# Altium PCB PCB2.PcbDoc
Units mil, origin at the board's own origin, x right, y up, seen from the top; angles counter-clockwise.
Board outline 2755.91 x 2755.91 mil, 4 copper layers (Top Layer, L2 (GND), L3, Bottom Layer), stack 52.112 mil thick; 68 components, 65 nets, 216 pads, 0 vias.
Unrouted connection lines stored in the file: 35.
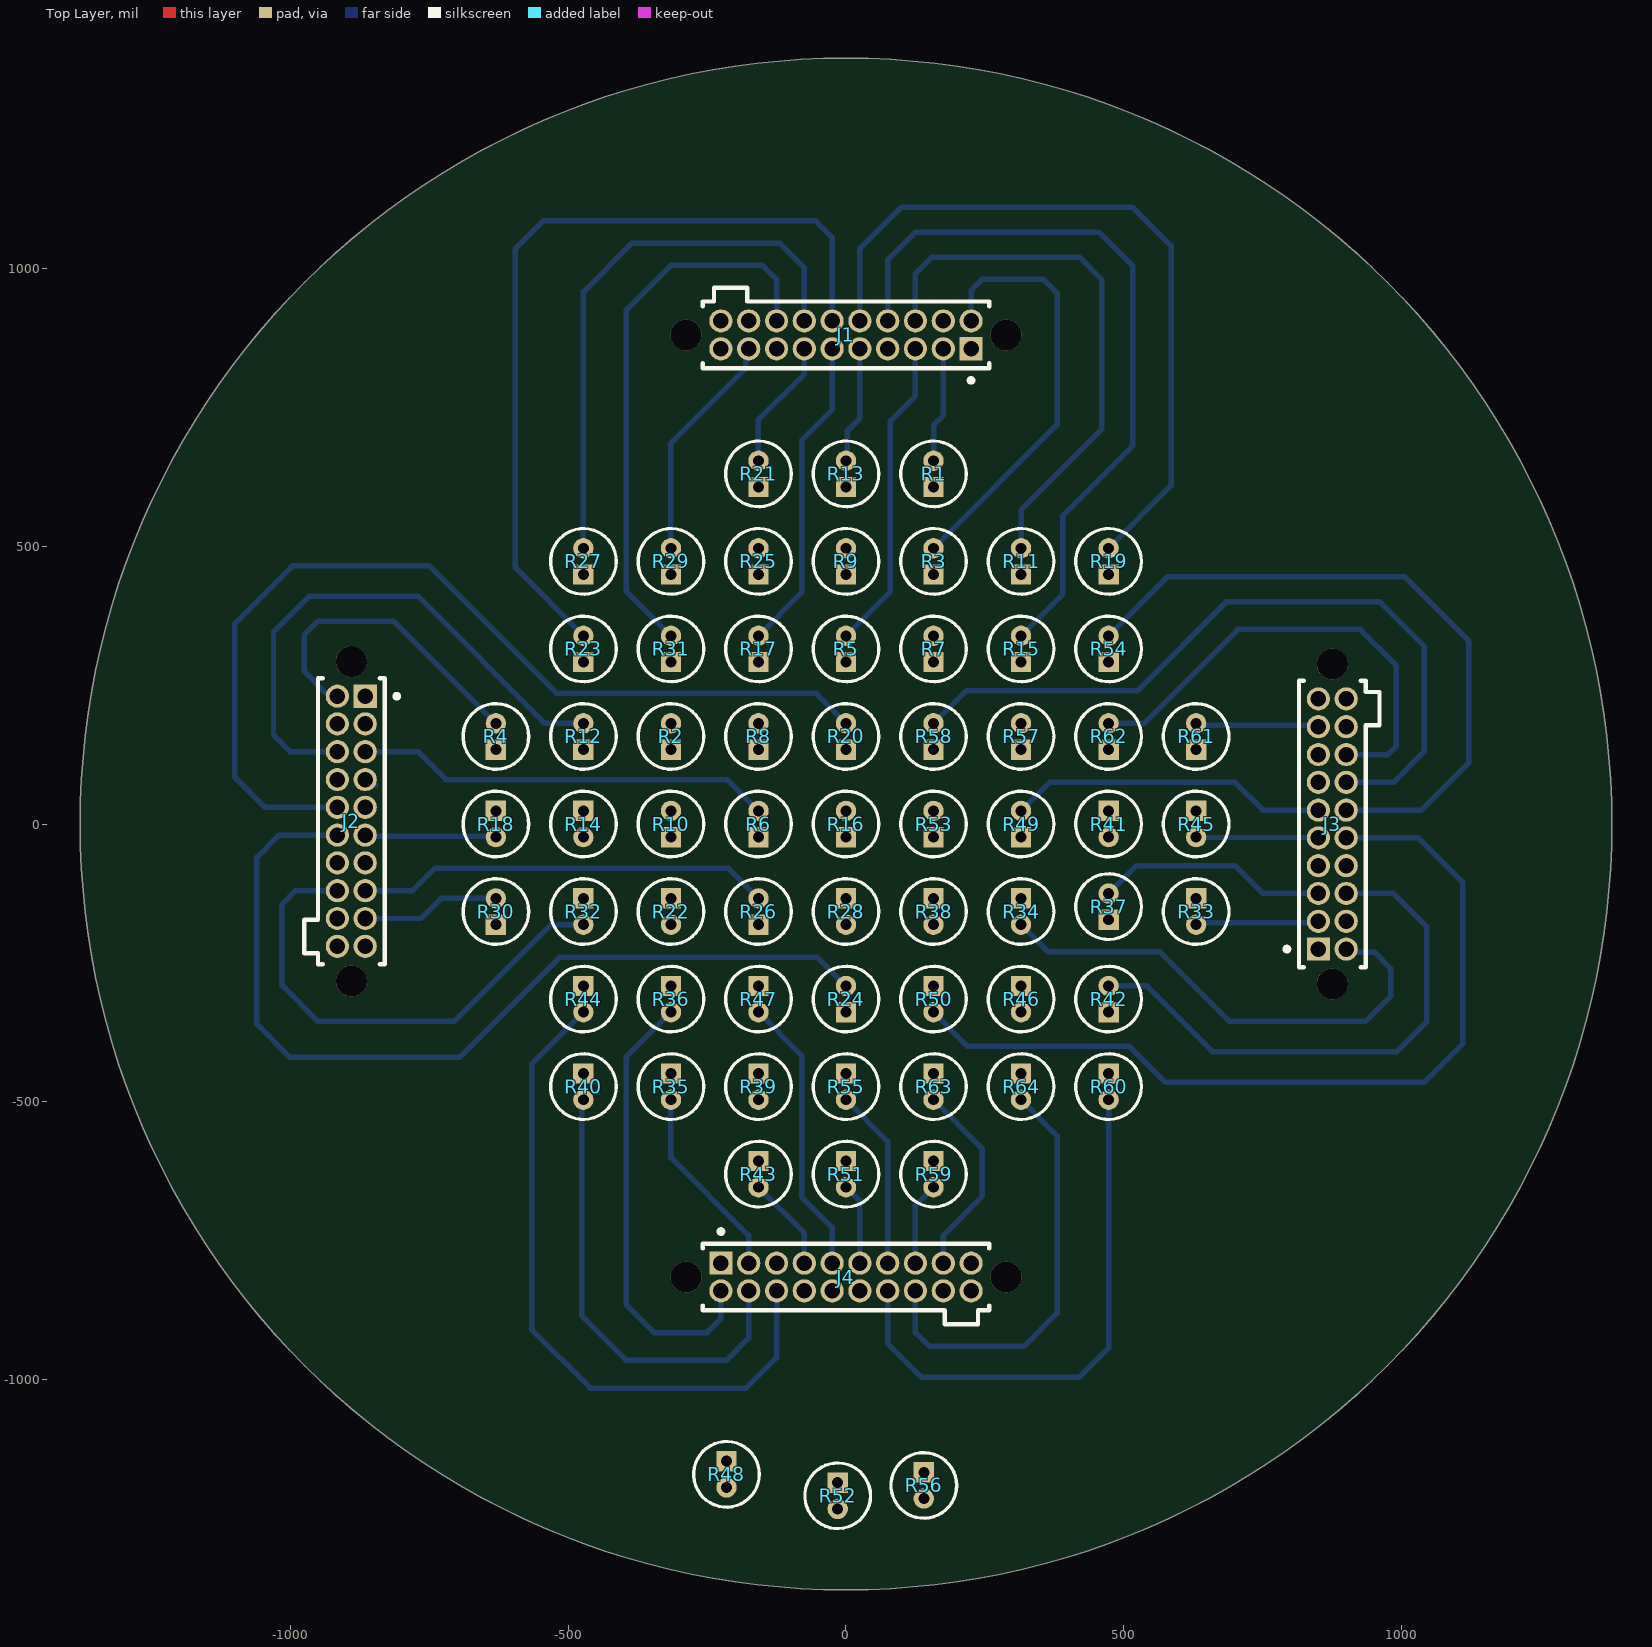
[diagram p0: Top Layer view]
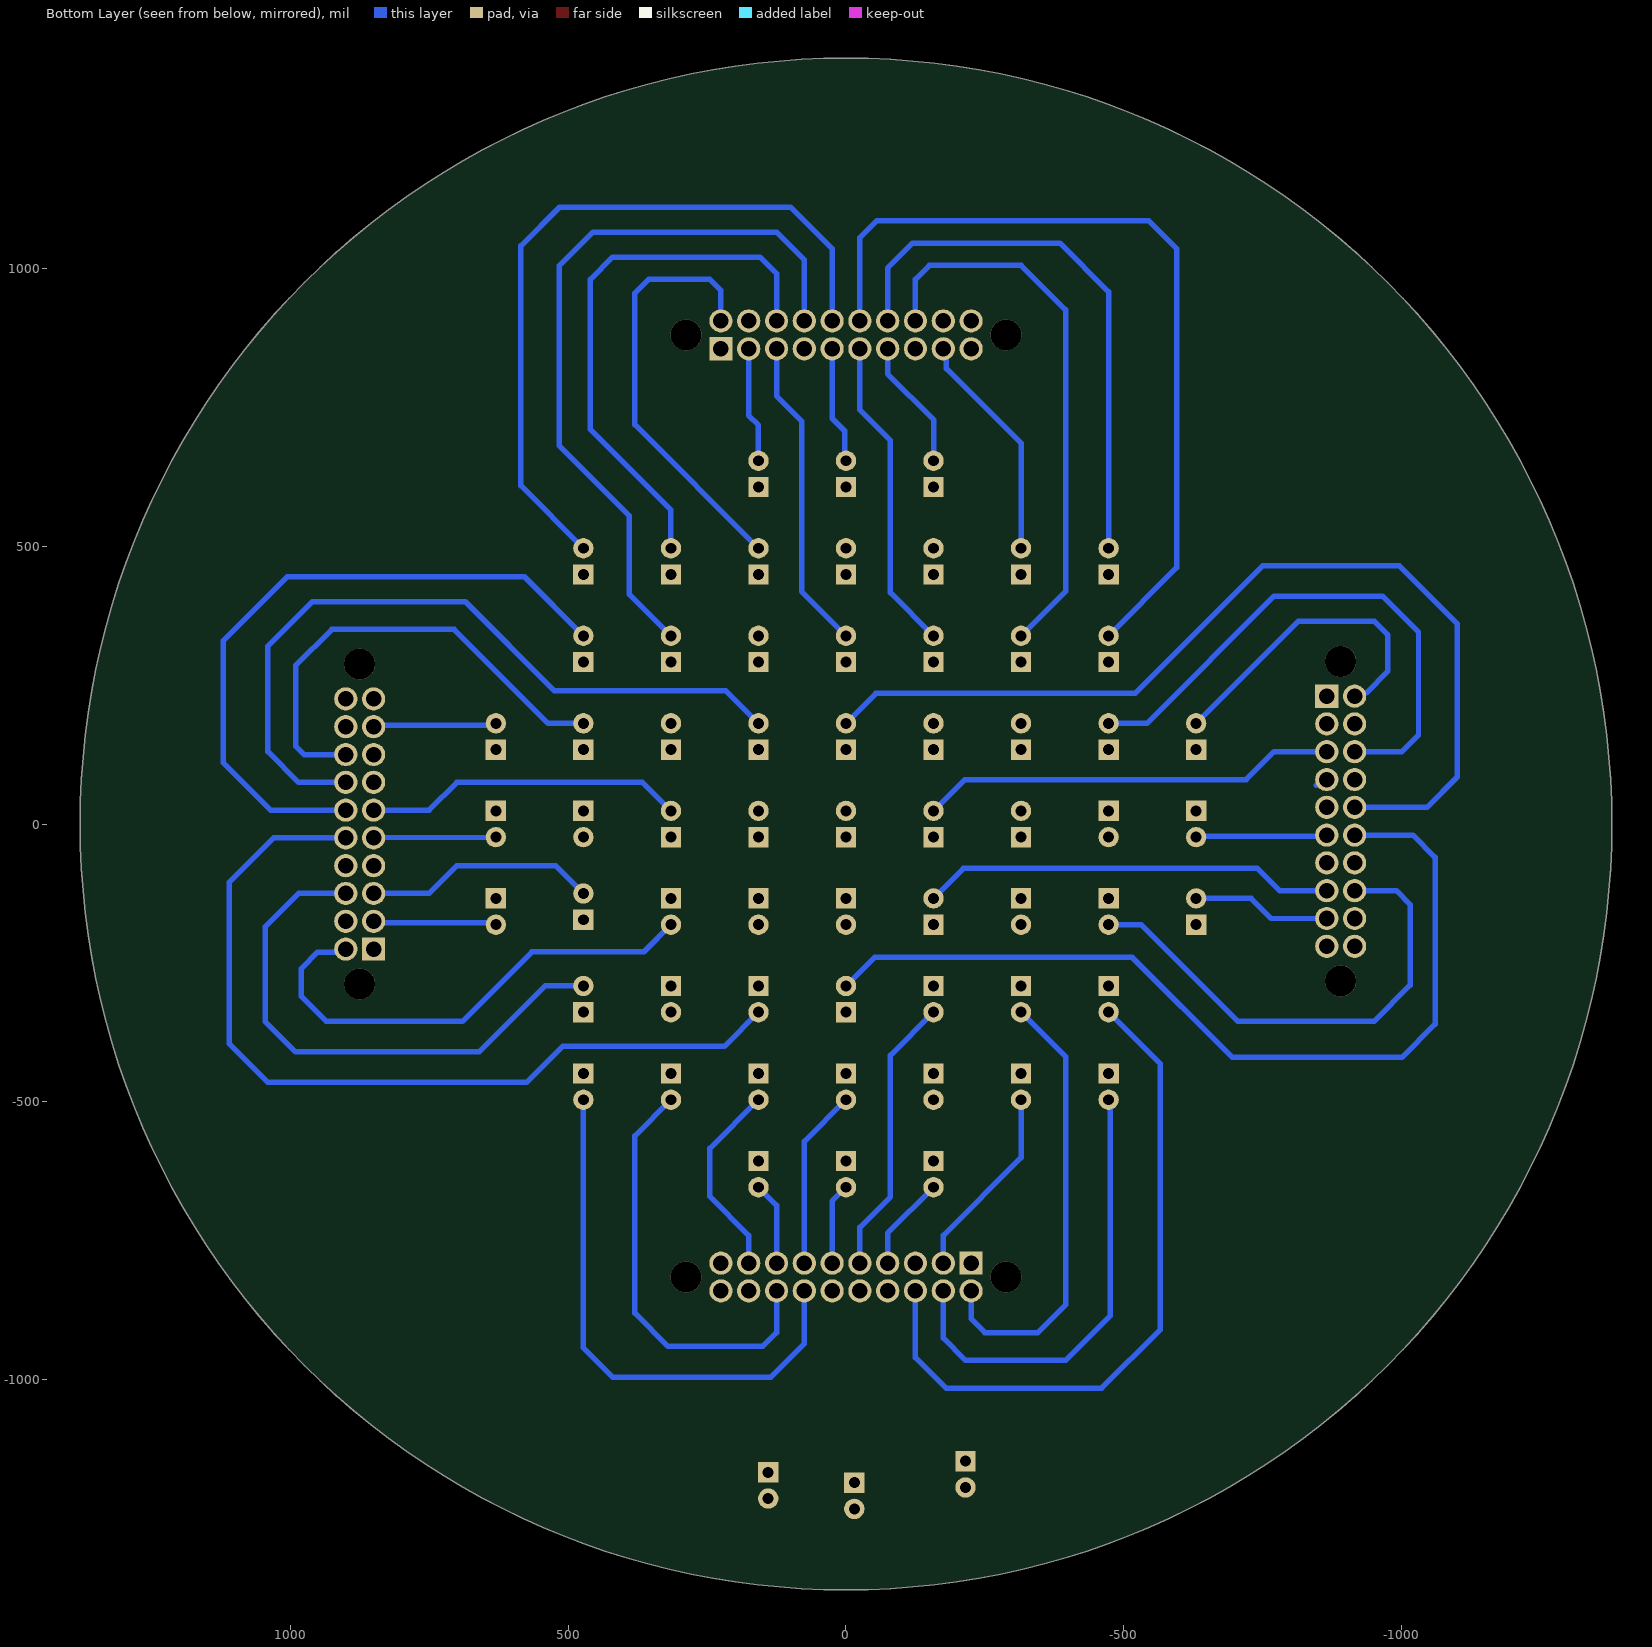
[diagram p1: Bottom Layer view, seen from below]
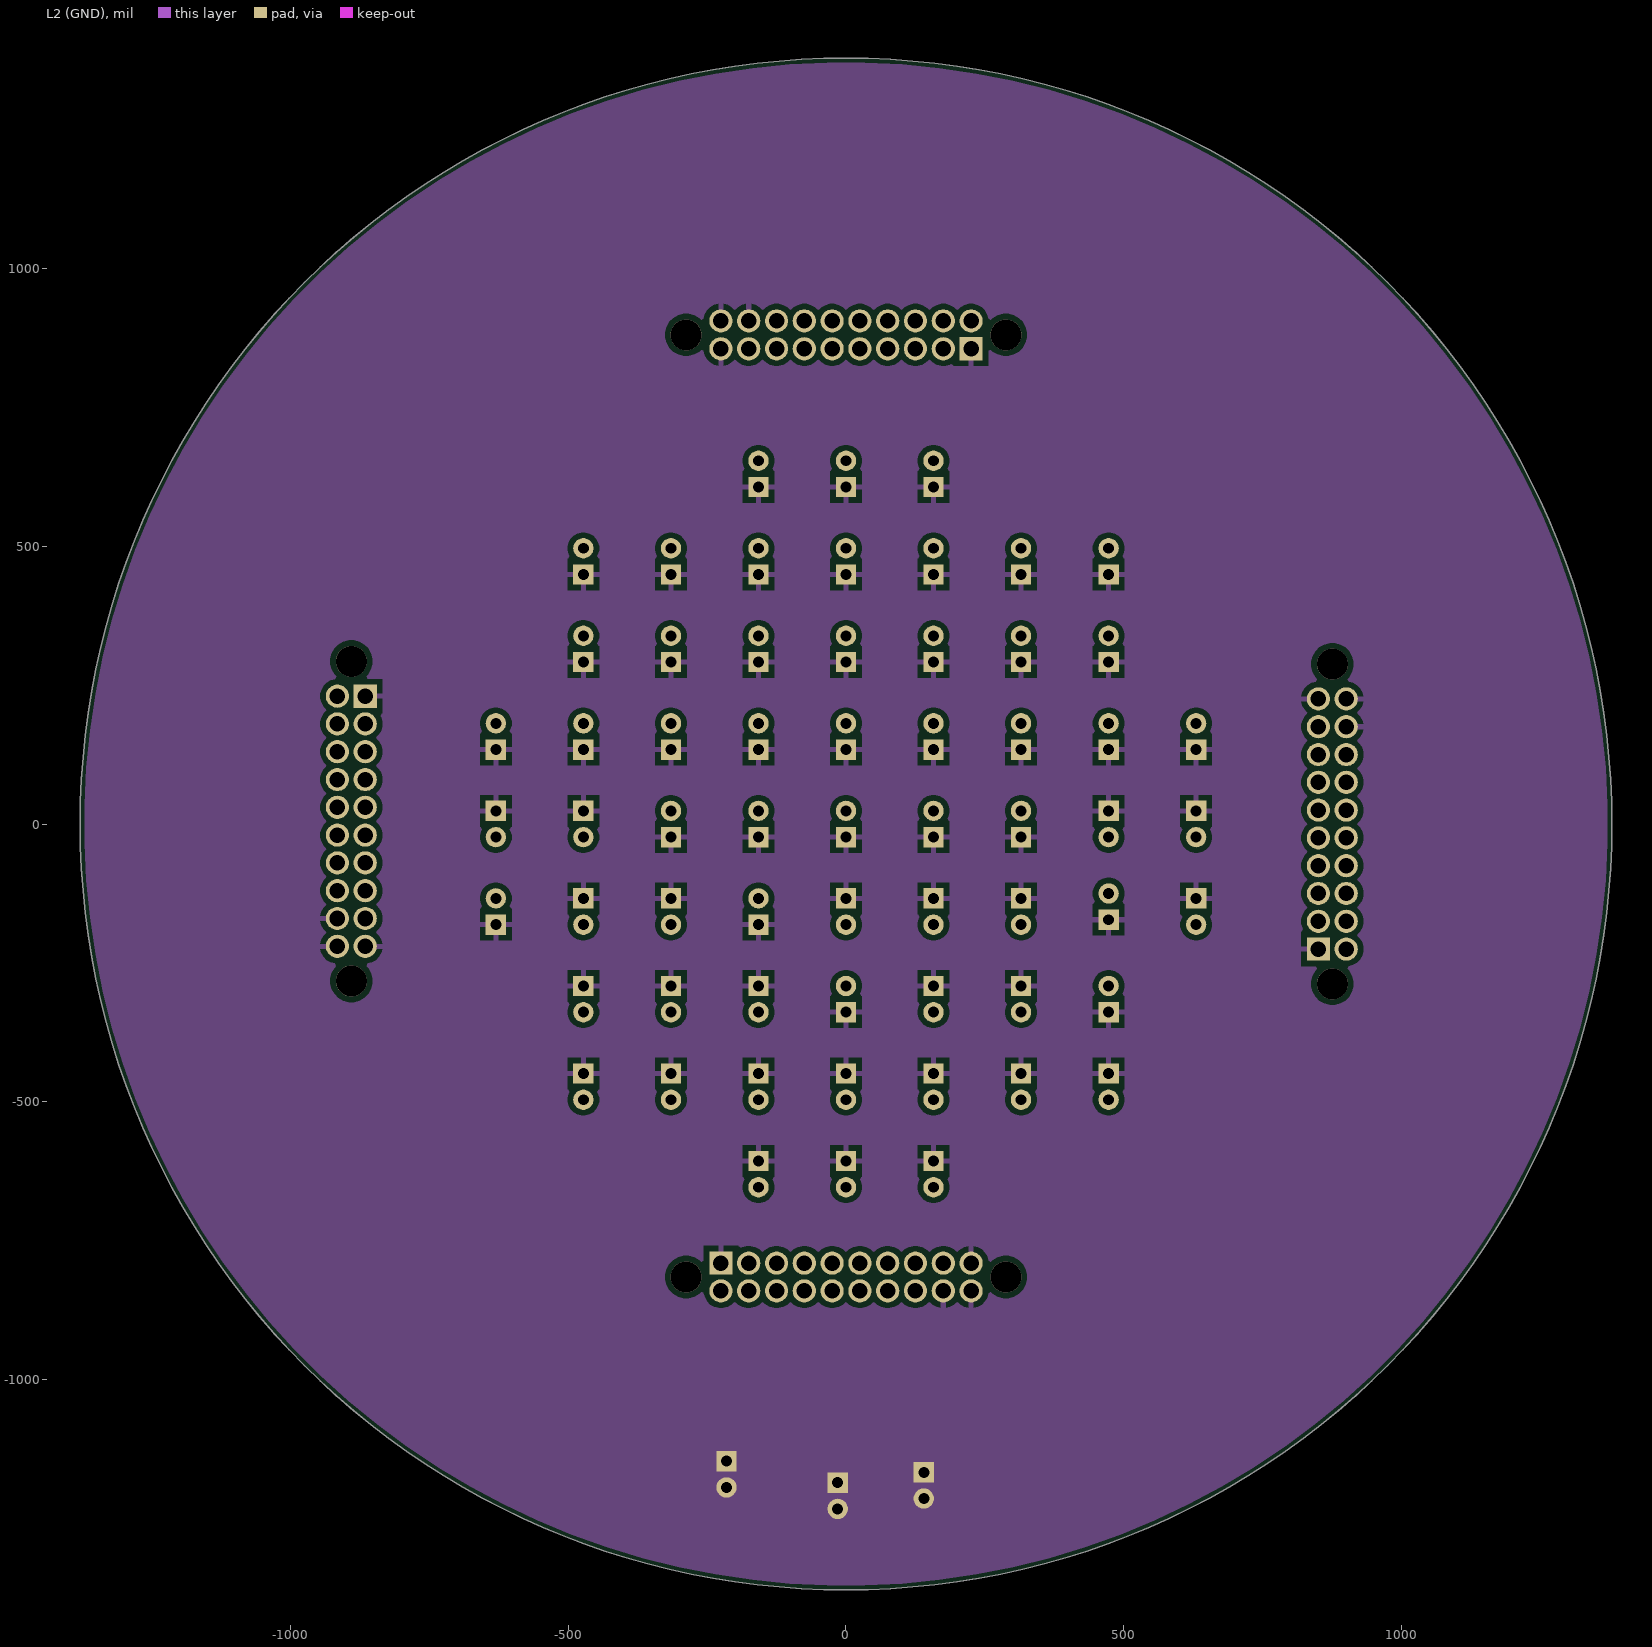
[diagram p2: L2 (GND)]
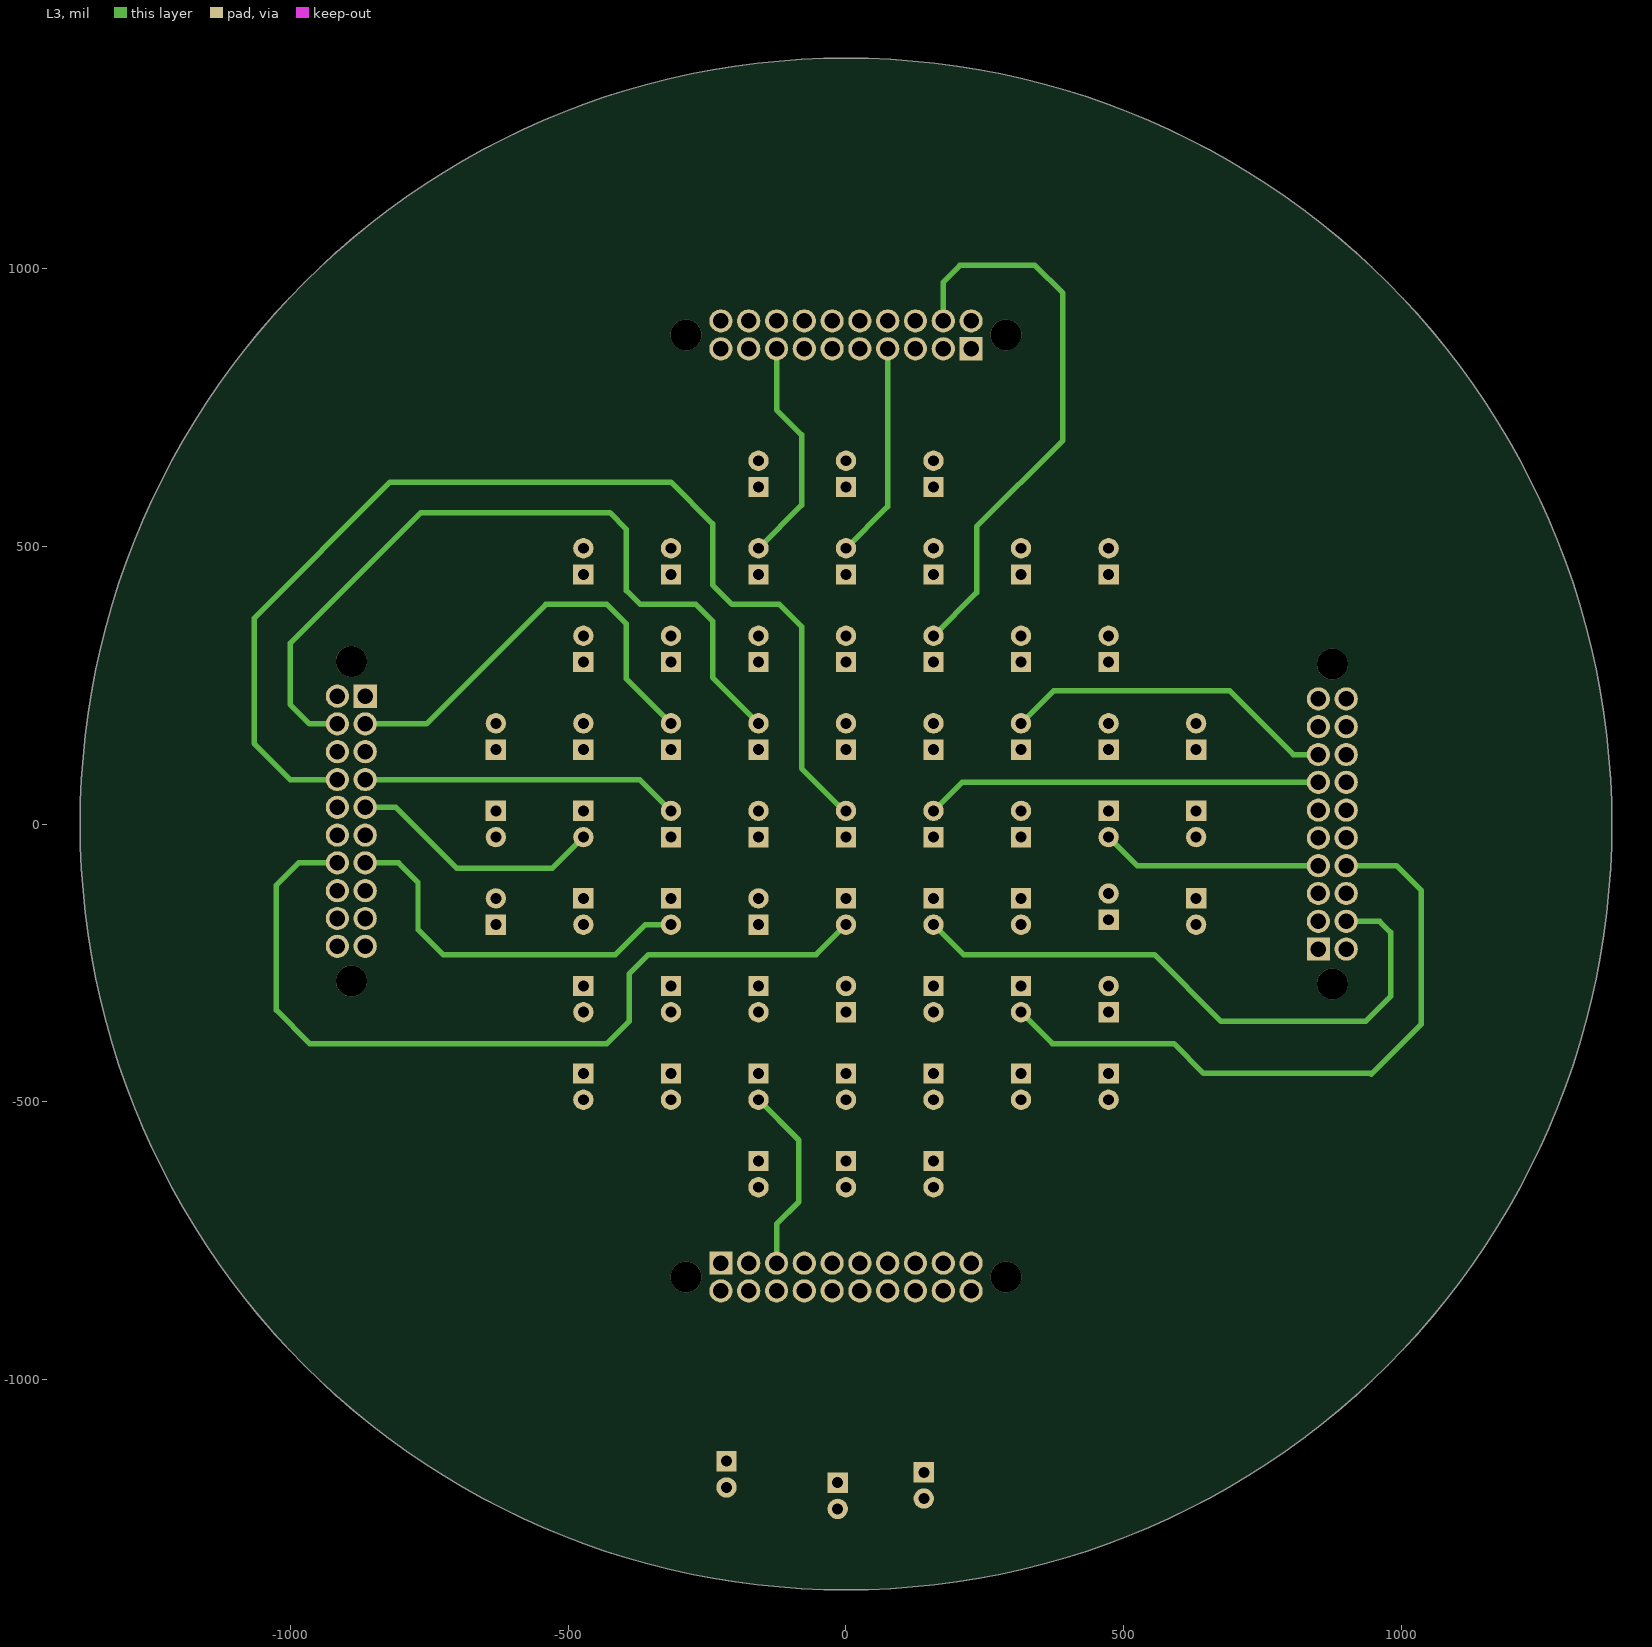
[diagram p3: L3]
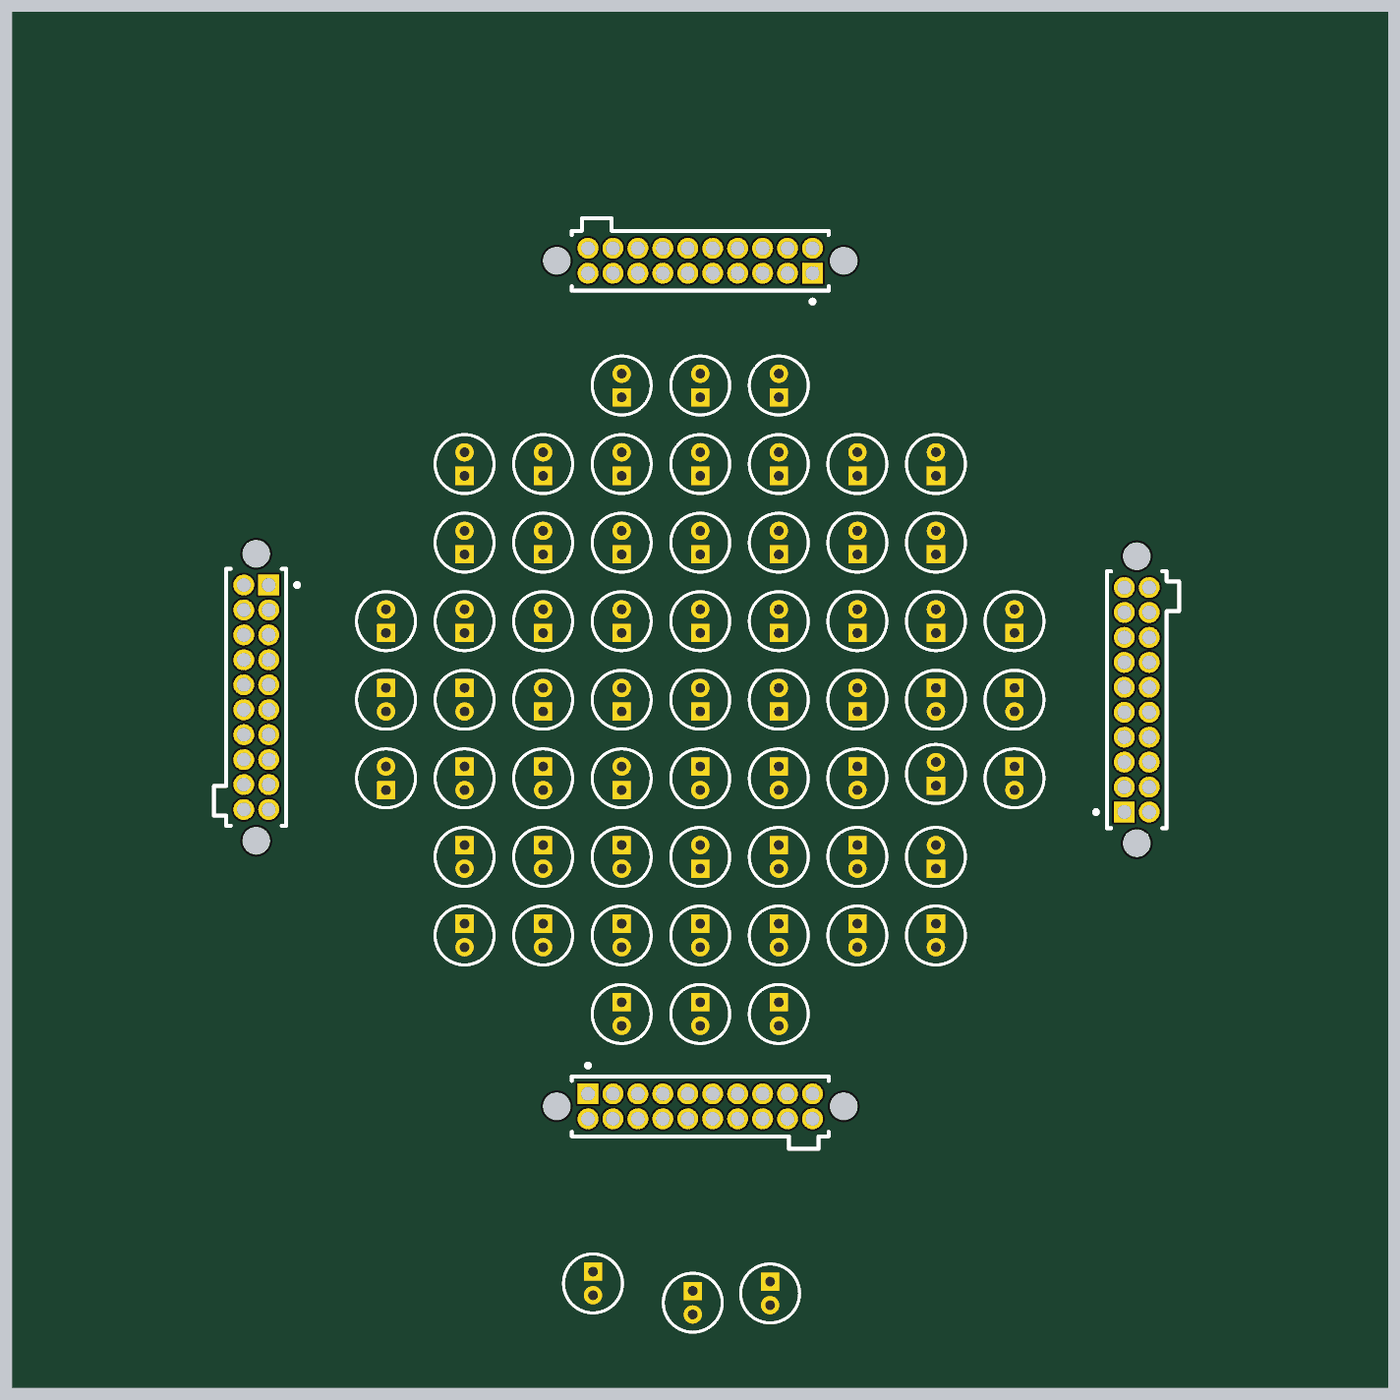
[diagram p4: 3D render of the assembled board from above, using the file's embedded part models]

## Layer stack, top to bottom
Top Solder: solder mask 1, SM-001, Dk 4
Top Layer: signal copper 1.378
Dielectric 2: prepreg 3.8, PP-012, Dk 4
L2 (GND): signal copper 1.378
Dielectric 1: core 39, Core-042, Dk 4.6
L3: signal copper 1.378
Dielectric 3: prepreg 3.8, PP-012, Dk 4
Bottom Layer: signal copper 1.378
Bottom Solder: solder mask 1, SM-001, Dk 4

## Board outline
0,-1377.95 cw(c0,0) -1377.95,0 cw(c0,0) 0,1377.95 cw(c0,0) 1377.95,0 cw(c0,0)

## Design rules (kind name [scope] priority, off if disabled: settings)
BoardOutlineClearance [All] p1: gap=7.87 ignorepadtopadclearanceinfootprint=FALSE
Clearance [All] p1: gap=9.84 ignorepadtopadclearanceinfootprint=FALSE
HoleSize [All] p1: absolutevalues=TRUE maxlimit=244.09 minlimit=7.87 maxpercent=80.000 minpercent=20.000
MinimumAnnularRing MinimumAnnularRing_1 [All] p1: minimumring=5.91
PolygonConnect [All] p1: connectstyle=Relief reliefconductorwidth=10 reliefentries=4 polygonreliefangle="90 Angle" airgapwidth=10
RoomDefinition Matrix [InComponentClass('Matrix')] p1: confinementstyle=ConfineIn formatcopy=TRUE lockcomponents=FALSE outline -1455,-1400 1445,-1400 1445,1425 -1455,1425
RoutingVias [All] p1: holewidth=11.81 width=27.56 viastyle="Through Hole" minholewidth=11.81 minwidth=27.56 maxholewidth=11.81 maxwidth=27.56
SolderMaskExpansion [All] p1: expansion=4 istentingtop=FALSE
UnRoutedNet [All] p1: checkbadconnections=TRUE
Width [All] p1: maxlimit=9.84 minlimit=9.84 preferedwidth=9.84
28 further rules are at their usual default settings.

## Components (designator, comment, footprint, x,y, rotation, side; value= is the part's Value field where it differs from the comment)
J1 "SFM-110-01-L-D-A" SAMTEC_SFM-110-01-L-D-A 0,880 r0 top value=5,13$
J2 "SFM-110-01-L-D-A" SAMTEC_SFM-110-01-L-D-A -890,5 r90 top value=5,13$
J3 "SFM-110-01-L-D-A" SAMTEC_SFM-110-01-L-D-A 875,0 r270 top value=5,13$
J4 "SFM-110-01-L-D-A" SAMTEC_SFM-110-01-L-D-A 0,-815 r180 top value=5,13$
R1 "NTCLE413E2103F524A" NTCLE413E2103F524A 157.48,629.92 r90 top
R2 "NTCLE413E2103F524A" NTCLE413E2103F524A -314.96,157.48 r90 top
R3 "NTCLE413E2103F524A" NTCLE413E2103F524A 157.48,472.44 r90 top
R4 "NTCLE413E2103F524A" NTCLE413E2103F524A -629.92,157.48 r90 top
R5 "NTCLE413E2103F524A" NTCLE413E2103F524A 0,314.96 r90 top
R6 "NTCLE413E2103F524A" NTCLE413E2103F524A -157.48,0 r90 top
R7 "NTCLE413E2103F524A" NTCLE413E2103F524A 157.48,314.96 r90 top
R8 "NTCLE413E2103F524A" NTCLE413E2103F524A -157.48,157.48 r90 top
R9 "NTCLE413E2103F524A" NTCLE413E2103F524A 0,472.44 r90 top
R10 "NTCLE413E2103F524A" NTCLE413E2103F524A -314.96,0 r90 top
R11 "NTCLE413E2103F524A" NTCLE413E2103F524A 314.96,472.44 r90 top
R12 "NTCLE413E2103F524A" NTCLE413E2103F524A -472.44,157.48 r90 top
R13 "NTCLE413E2103F524A" NTCLE413E2103F524A 0,629.92 r90 top
R14 "NTCLE413E2103F524A" NTCLE413E2103F524A -472.44,0 r270 top
R15 "NTCLE413E2103F524A" NTCLE413E2103F524A 314.96,314.96 r90 top
R16 "NTCLE413E2103F524A" NTCLE413E2103F524A 0,0 r90 top
R17 "NTCLE413E2103F524A" NTCLE413E2103F524A -157.48,314.96 r90 top
R18 "NTCLE413E2103F524A" NTCLE413E2103F524A -629.92,0 r270 top
R19 "NTCLE413E2103F524A" NTCLE413E2103F524A 472.44,472.44 r90 top
R20 "NTCLE413E2103F524A" NTCLE413E2103F524A 0,157.48 r90 top
R21 "NTCLE413E2103F524A" NTCLE413E2103F524A -157.48,629.92 r90 top
R22 "NTCLE413E2103F524A" NTCLE413E2103F524A -314.96,-157.48 r270 top
R23 "NTCLE413E2103F524A" NTCLE413E2103F524A -472.44,314.96 r90 top
R24 "NTCLE413E2103F524A" NTCLE413E2103F524A 0,-314.96 r90 top
R25 "NTCLE413E2103F524A" NTCLE413E2103F524A -157.48,472.44 r90 top
R26 "NTCLE413E2103F524A" NTCLE413E2103F524A -157.48,-157.48 r90 top
R27 "NTCLE413E2103F524A" NTCLE413E2103F524A -472.44,472.44 r90 top
R28 "NTCLE413E2103F524A" NTCLE413E2103F524A 0,-157.48 r270 top
R29 "NTCLE413E2103F524A" NTCLE413E2103F524A -314.96,472.44 r90 top
R30 "NTCLE413E2103F524A" NTCLE413E2103F524A -629.92,-157.48 r90 top
R31 "NTCLE413E2103F524A" NTCLE413E2103F524A -314.96,314.96 r90 top
R32 "NTCLE413E2103F524A" NTCLE413E2103F524A -472.44,-157.48 r270 top
R33 "NTCLE413E2103F524A" NTCLE413E2103F524A 629.92,-157.48 r270 top
R34 "NTCLE413E2103F524A" NTCLE413E2103F524A 314.96,-157.48 r270 top
R35 "NTCLE413E2103F524A" NTCLE413E2103F524A -314.96,-472.44 r270 top
R36 "NTCLE413E2103F524A" NTCLE413E2103F524A -314.96,-314.96 r270 top
R37 "NTCLE413E2103F524A" NTCLE413E2103F524A 472.44,-148.62 r90 top
R38 "NTCLE413E2103F524A" NTCLE413E2103F524A 157.48,-157.48 r270 top
R39 "NTCLE413E2103F524A" NTCLE413E2103F524A -157.48,-472.44 r270 top
R40 "NTCLE413E2103F524A" NTCLE413E2103F524A -472.44,-472.44 r270 top
R41 "NTCLE413E2103F524A" NTCLE413E2103F524A 472.44,0 r270 top
R42 "NTCLE413E2103F524A" NTCLE413E2103F524A 472.44,-314.96 r90 top
R43 "NTCLE413E2103F524A" NTCLE413E2103F524A -157.48,-629.92 r270 top
R44 "NTCLE413E2103F524A" NTCLE413E2103F524A -472.44,-314.96 r270 top
R45 "NTCLE413E2103F524A" NTCLE413E2103F524A 629.92,0 r270 top
R46 "NTCLE413E2103F524A" NTCLE413E2103F524A 314.96,-314.96 r270 top
R47 "NTCLE413E2103F524A" NTCLE413E2103F524A -157.48,-314.96 r270 top
R48 "NTCLE413E2103F524A" NTCLE413E2103F524A -215,-1170 r270 top
R49 "NTCLE413E2103F524A" NTCLE413E2103F524A 314.96,0 r90 top
R50 "NTCLE413E2103F524A" NTCLE413E2103F524A 157.48,-314.96 r270 top
R51 "NTCLE413E2103F524A" NTCLE413E2103F524A 0,-629.92 r270 top
R52 "NTCLE413E2103F524A" NTCLE413E2103F524A -15,-1208.62 r270 top
R53 "NTCLE413E2103F524A" NTCLE413E2103F524A 157.48,0 r90 top
R54 "NTCLE413E2103F524A" NTCLE413E2103F524A 472.44,314.96 r90 top
R55 "NTCLE413E2103F524A" NTCLE413E2103F524A 0,-472.44 r270 top
R56 "NTCLE413E2103F524A" NTCLE413E2103F524A 140,-1190 r270 top
R57 "NTCLE413E2103F524A" NTCLE413E2103F524A 314.96,157.48 r90 top
R58 "NTCLE413E2103F524A" NTCLE413E2103F524A 157.48,157.48 r90 top
R59 "NTCLE413E2103F524A" NTCLE413E2103F524A 157.48,-629.92 r270 top
R60 "NTCLE413E2103F524A" NTCLE413E2103F524A 472.44,-472.44 r270 top
R61 "NTCLE413E2103F524A" NTCLE413E2103F524A 629.92,157.48 r90 top
R62 "NTCLE413E2103F524A" NTCLE413E2103F524A 472.44,157.48 r90 top
R63 "NTCLE413E2103F524A" NTCLE413E2103F524A 157.48,-472.44 r270 top
R64 "NTCLE413E2103F524A" NTCLE413E2103F524A 314.96,-472.44 r270 top

## Footprints (in the part's own frame and the unit in brackets; to place one, negate y for a bottom-side part, rotate by r counter-clockwise, add the part's x,y. Pads: shape width x height; smd on the part's side, far side on the other; paste and mask are expansions set on the pad)
NTCLE413E2103F524A [mm]
  rect 0.93x0.93 hole 0.5 paste-1000 mask+0: 1(-0.6,0)
  round 0.93 hole 0.5 paste-1000 mask+0: 2(0.6,0)
  silkscreen extent -1.5,-1.5 1.5,1.5, body extent -1.48,-1.5 1.48,1.5, height 1
SAMTEC_SFM-110-01-L-D-A [mm]
  rect 1.06x1.06 hole 0.71: 01(5.715,-0.635)
  round 1.06 hole 0.71: 02(5.715,0.635) 03(4.445,-0.635) 04(4.445,0.635) 05(3.175,-0.635) 06(3.175,0.635) 07(1.905,-0.635) 08(1.905,0.635) 09(0.635,-0.635) 10(0.635,0.635) 11(-0.635,-0.635) 12(-0.635,0.635) 13(-1.905,-0.635) 14(-1.905,0.635) 15(-3.175,-0.635) 16(-3.175,0.635) 17(-4.445,-0.635) 18(-4.445,0.635) 19(-5.715,-0.635) 20(-5.715,0.635)
  round 1.42 hole 1.42 unplated: ""(-7.305,0) ""(7.305,0)
  silkscreen extent -6.54,-2.18 6.54,2.15

## Part data
J1 J2 J3 J4: library part CMP-022-000000-2, "Conn Socket Strip SKT 20 POS 1.27mm Solder ST SMD", Package=None, __ORIG_LIFECYCLESTATEGUID__=706004B5-C76E-482E-903B-BA0E4FAE086A, Availability=Unavailable, Component Type=Connectors, Contact Material=Copper, Contact Plating=Gold, Design Item ID=SFM-110-01-L-D-A, Gender=Receptacle, MF="Samtec Inc.", Mounting Technology="Through Hole", MP=SFM-110-01-L-D-A, Number of Contacts=20, Number of Rows=2, Packaging=Rail/Tube, Pin Count=20, Pitch=1.27mm, Price=None, Reach SVHC Compliant=Yes, RoHS Compliant=Yes, Source=SFM-110-01-L-D-A.SchLib, Termination=Solder
R1 R2 R3 R4 R5 R6 R7 R8 R9 R10 R11 R12 R13 R14 R15 R16 R17 R18 R19 R20 R21 R22 R23 R24 R25 R26 R27 R28 R29 R30 R31 R32 R33 R34 R35 R36 R37 R38 R39 R40 R41 R42 R43 R44 R45 R46 R47 R48 R49 R50 R51 R52 R53 R54 R55 R56 R57 R58 R59 R60 R61 R62 R63 R64: library part CMP-009-00185-19, "NTC epoxy PVC AWG30 105°C 10K 1% 3435K 1% L52 A", RoHS Compliant=Yes

## Nets (pads, with @x,y where several pads share a name; then routed paths per layer and width w, separated by ;. In a path a pad name is that pad's centre, name@x,y a point inside that pad or via, vN(x,y) a via of type N, cw(c..) or ccw(c..) an arc to the next point about the centre after c; other vN are vias at no path point)
A1: J1.03 R1.2 | length 208.7
  Bottom Layer w9.84: R1.2 157.48,717.48 175,735 J1.03
A2: J1.05 R5.2 | length 568.2
  Bottom Layer w9.84: R5.2 80,418.58 80,725 125,770 J1.05
A3: J1.07 R9.2 | length 390
  L3 w9.84: R9.2 75,571.06 J1.07
A4: J1.09 R13.2 | length 211.8
  Bottom Layer w9.84: R13.2 2.5,656.04 2.5,707.5 25,730 J1.09
A5: J1.11 R17.2 | length 571.3
  Bottom Layer w9.84: R17.2 -80,416.06 -80,690 -25,745 J1.11
A6: J1.13 R21.2 | length 235.6
  Bottom Layer w9.84: R21.2 -157.48,727.52 -75,810 J1.13
A7: J1.15 R25.2 | length 410.6
  L3 w9.84: R25.2 -80,573.54 -80,700 -125,745 J1.15
  Bottom Layer w9.84: J1.15@-125.63,854.37 J1.15
A8: J1.17 R29.2 | length 416.9
  Bottom Layer w9.84: R29.2 -314.96,685.04 -180.63,819.37 -180.63,849.37 J1.17
A10: J1.02 R3.2 | length 779.7
  Bottom Layer w9.84: R3.2 380,718.58 380,955 355,980 245,980 225,960 J1.02
A11: J1.04 R7.2 | length 1030.9
  L3 w9.84: R7.2 235,416.1 235,535 390,690 390,955 340,1005 205,1005 175,975 J1.04
A12: J1.06 R11.2 | length 993
  Bottom Layer w9.84: J1.06 125,990 155,1020 420,1020 460,980 460,710 315,565 R11.2 R11.2
A13: J1.08 R15.2 | length 1345.7
  Bottom Layer w9.84: J1.08 75,1015 125,1065 455,1065 516.05,1003.95 516.05,681.05 390,555 390,413.62 R15.2
A14: J1.10 R19.2 | length 1340.6
  Bottom Layer w9.84: J1.10 25,1035 100,1110 515,1110 585,1040 585,608.62 R19.2
A15: J1.12 R23.2 | length 1500.3
  Bottom Layer w9.84: R23.2 -595,461.14 -595,1035 -545,1085 -55,1085 -25,1055 J1.12
A16: J1.14 R27.2 | length 1008.8
  Bottom Layer w9.84: R27.2 -472.44,957.56 -385,1045 -120,1045 -75,1000 J1.14
A17: J1.16 R31.2 | length 1008.1
  Bottom Layer w9.84: R31.2 -395,418.62 -395,925 -315,1005 -150,1005 -125,980 J1.16
B1: J2.03 R2.2 | length 785.6
  L3 w9.84: J2.03 -755,180 -540,395 -430,395 -395,360 -395,261.14 R2.2
B2: J2.05 R6.2 | length 751.6
  Bottom Layer w9.84: J2.05 -770,130 -720,80 -213.86,80 R6.2
B3: J2.07 R10.2 | length 596.2
  L3 w9.84: J2.07 -371.34,80 R10.2
  Bottom Layer w9.84: J2.07 -856.37,80 -846.37,70
B4: J2.09 R14.2 | length 461.5
  L3 w9.84: J2.09 -810,30 -700,-80 -528.82,-80 R14.2
B5: J2.11 R18.2 | length 236.6
  Bottom Layer w9.84: J2.11 -863.19,-21.81 -631.73,-21.81 R18.2
B6: J2.13 R22.2 | length 690.5
  L3 w9.84: J2.13 -805,-70 -770,-105 -770,-190 -725,-235 -415,-235 -361.1,-181.1 R22.2
B7: J2.15 R26.2 | length 746.4
  Bottom Layer w9.84: J2.15 -780,-120 -740,-80 -211.34,-80 R26.2
B8: J2.17 R30.2 | length 250
  Bottom Layer w9.84: J2.17 -764.84,-170 -728.7,-133.86 R30.2
B10: J2.02 R4.2 | length 574.6
  Bottom Layer w9.84: J2.02 -921.1,236.1 -936.1,236.1 -975,275 -975,340 -950,365 -813.82,365 R4.2@-630.37,181.55
B11: J2.04 R8.2 | length 1430.1
  L3 w9.84: J2.04 -965,180 -1000,215 -1000,325 -765,560 -425,560 -395,530 -395,420 -370,395 -270,395 -240,365 -240,263.62 R8.2
B12: J2.06 R12.2 | length 991.7
  Bottom Layer w9.84: J2.06 -1000,130 -1030,160 -1030,345 -965,410 -770,410 -541.1,181.1 R12.2
B13: J2.08 R16.2 | length 2027.2
  L3 w9.84: J2.08 -1000,80 -1065,145 -1065,370 -820,615 -315,615 -240,540 -240,430 -205,395 -120,395 -80,355 -80,100 -3.62,23.62 R16.2
B14: J2.10 R20.2 | length 1743.9
  Bottom Layer w9.84: J2.10 -1045,30 -1100,85 -1100,360 -995,465 -750,465 -520,235 -53.9,235 R20.2
B15: J2.12 R24.2 | length 1642.2
  Bottom Layer w9.84: J2.12 -1020,-20 -1060,-60 -1060,-360 -1000,-420 -695,-420 -515,-240 -51.34,-240 R24.2
B16: J2.14 R28.2 | length 1539.8
  L3 w9.84: J2.14 -985,-70 -1025,-110 -1025,-335 -965,-395 -430,-395 -390,-355 -390,-270 -355,-235 -53.9,-235 R28.2
B17: J2.16 R32.2 | length 896.9
  Bottom Layer w9.84: J2.16 -990,-120 -1015,-145 -1015,-290 -950,-355 -705,-355 -531.1,-181.1 R32.2
C1: J3.03 R33.2 | length 222.6
  Bottom Layer w9.84: R33.2 632.97,-178.05 846.95,-178.05 J3.03
C2: J3.05 R37.2 | length 419
  Bottom Layer w9.84: R37.2 522.44,-75 700,-75 750,-125 J3.05
C3: J3.07 R41.2 | length 405.9
  L3 w9.84: R41.2 523.82,-75 J3.07
  Bottom Layer w9.84: J3.07@845,-70 J3.07
C4: J3.09 R45.2 | length 220.6
  Bottom Layer w9.84: R45.2 630.61,-24.31 849.31,-24.31 J3.09
C5: J3.11 R49.2 | length 577
  Bottom Layer w9.84: R49.2 366.34,75 700,75 750,25 J3.11
C6: J3.13 R53.2 | length 713.8
  L3 w9.84: R53.2 208.86,75 J3.13
C7: J3.15 R57.2 | length 607.1
  L3 w9.84: R57.2 373.86,240 690,240 805,125 J3.15
C8: J3.17 R61.2 | length 222.6
  Bottom Layer w9.84: R61.2 632.97,178.05 846.95,178.05 J3.17
C10: J3.02 R34.2 | length 890.2
  Bottom Layer w9.84: R34.2 363.86,-230 565,-230 690,-355 935,-355 980,-310 980,-260 950.63,-230.63 915.63,-230.63 J3.02@910,-225
C11: J3.04 R38.2 | length 1116.5
  L3 w9.84: R38.2 211.38,-235 555,-235 675,-355 935,-355 980,-310 980,-195 960,-175 J3.04
C12: J3.06 R42.2 | length 974.3
  Bottom Layer w9.84: R42.2 541.34,-291.34 660,-410 990,-410 1045,-355 1045,-185 985,-125 J3.06@910,-125
C13: J3.08 R46.2 | length 1197.1
  L3 w9.84: R46.2 371.38,-395 590,-395 643.49,-448.49 943.49,-448.49 945,-450 1035,-360 1035,-120 990,-75 J3.08
C14: J3.10 R50.2 | length 1557
  Bottom Layer w9.84: R50.2 218.9,-400 510,-400 575,-465 1040,-465 1110,-395 1110,-105 1030,-25 J3.10@910,-25
C15: J3.12 R54.2 | length 1214.5
  Bottom Layer w9.84: R54.2 578.86,445 1005,445 1120,330 1120,110 1035,25 J3.12
C16: J3.14 R58.2 | length 1359.1
  Bottom Layer w9.84: R58.2 216.38,240 525,240 685,400 960,400 1040,320 1040,130 985,75 J3.14
C17: J3.16 R62.2 | length 855.7
  Bottom Layer w9.84: R62.2 536.1,181.1 705,350 925,350 990,285 990,140 975,125 J3.16
D1: J4.03 R35.2 | length 351.9
  Bottom Layer w9.84: R35.2 -314.96,-600.04 -175,-740 J4.03
D2: J4.05 R39.2 | length 340.5
  L3 w9.84: R39.2 -85,-568.54 -85,-680 -125,-720 J4.05
D3: J4.07 R43.2 | length 170.6
  Bottom Layer w9.84: R43.2 -75,-736.02 J4.07
D4: J4.09 R47.2 | length 506.3
  Bottom Layer w9.84: R47.2 -80,-416.06 -80,-670.69 -25,-725.69 J4.09
D5: J4.11 R51.2 | length 146.8
  Bottom Layer w9.84: R51.2 25,-678.54 J4.11
D6: J4.13 R55.2 | length 325
  Bottom Layer w9.84: R55.2 75,-571.06 J4.13
D7: J4.15 R59.2 | length 149.9
  Bottom Layer w9.84: J4.15 125,-686.02 R59.2
D8: J4.17 R63.2 | length 359.2
  Bottom Layer w9.84: R63.2 245,-583.58 245,-670 175,-740 J4.17
D10: J4.02 R36.2 | length 810.6
  Bottom Layer w9.84: R36.2 -395,-418.62 -395,-865 -345,-915 -250,-915 -225,-890 J4.02
D11: J4.04 R40.2 | length 824.7
  Bottom Layer w9.84: R40.2 -475,-498.62 -475,-885 -395,-965 -215,-965 -175,-925 J4.04
D12: J4.06 R44.2 | length 1236
  Bottom Layer w9.84: R44.2 -565,-431.14 -565,-910 -460,-1015 -180,-1015 -125,-960 J4.06
D13: J4.08 R48.2
D14: J4.10 R52.2
D15: J4.12 R56.2
D16: J4.14 R60.2 | length 985.5
  Bottom Layer w9.84: J4.14 75,-935 135,-995 420,-995 472.44,-942.56 R60.2
D17: J4.16 R64.2 | length 776.1
  Bottom Layer w9.84: J4.16 125,-915 150,-940 320,-940 380,-880 380,-561.1 R64.2
GND: J1.01 J1.18 J1.19 J1.20 J2.01 J2.18 J2.19 J2.20 J3.01 J3.18 J3.19 J3.20 J4.01 J4.18 J4.19 J4.20 R1.1 R2.1 R3.1 R4.1 R5.1 R6.1 R7.1 R8.1 R9.1 R10.1 R11.1 R12.1 R13.1 R14.1 R15.1 R16.1 R17.1 R18.1 R19.1 R20.1 R21.1 R22.1 R23.1 R24.1 R25.1 R26.1 R27.1 R28.1 R29.1 R30.1 R31.1 R32.1 R33.1 R34.1 R35.1 R36.1 R37.1 R38.1 R39.1 R40.1 R41.1 R42.1 R43.1 R44.1 R45.1 R46.1 R47.1 R48.1 R49.1 R50.1 R51.1 R52.1 R53.1 R54.1 R55.1 R56.1 R57.1 R58.1 R59.1 R60.1 R61.1 R62.1 R63.1 R64.1
pads on no net: J1. J2. J3. J4.

## Polygon pours and split planes (outlines as drawn)
GND on L2 (GND) "Top GND" (solid, remove dead copper, pour order 2): 0,-1377.95 cw(c0,0) -1377.95,0 cw(c0,0) 0,1377.95 cw(c0,0) 1377.95,0 cw(c0,0)